# Altium PCB AX301_AX4010.PcbDoc (part 6 of 10)
Units mil, origin at the board's own origin, x right, y up, seen from the top; angles counter-clockwise.
Board outline 5185 x 3614 mil, 4 copper layers (Top Layer, GND, Mid-Layer 1, Bottom Layer); 191 components, 338 nets, 1108 pads, 420 vias.
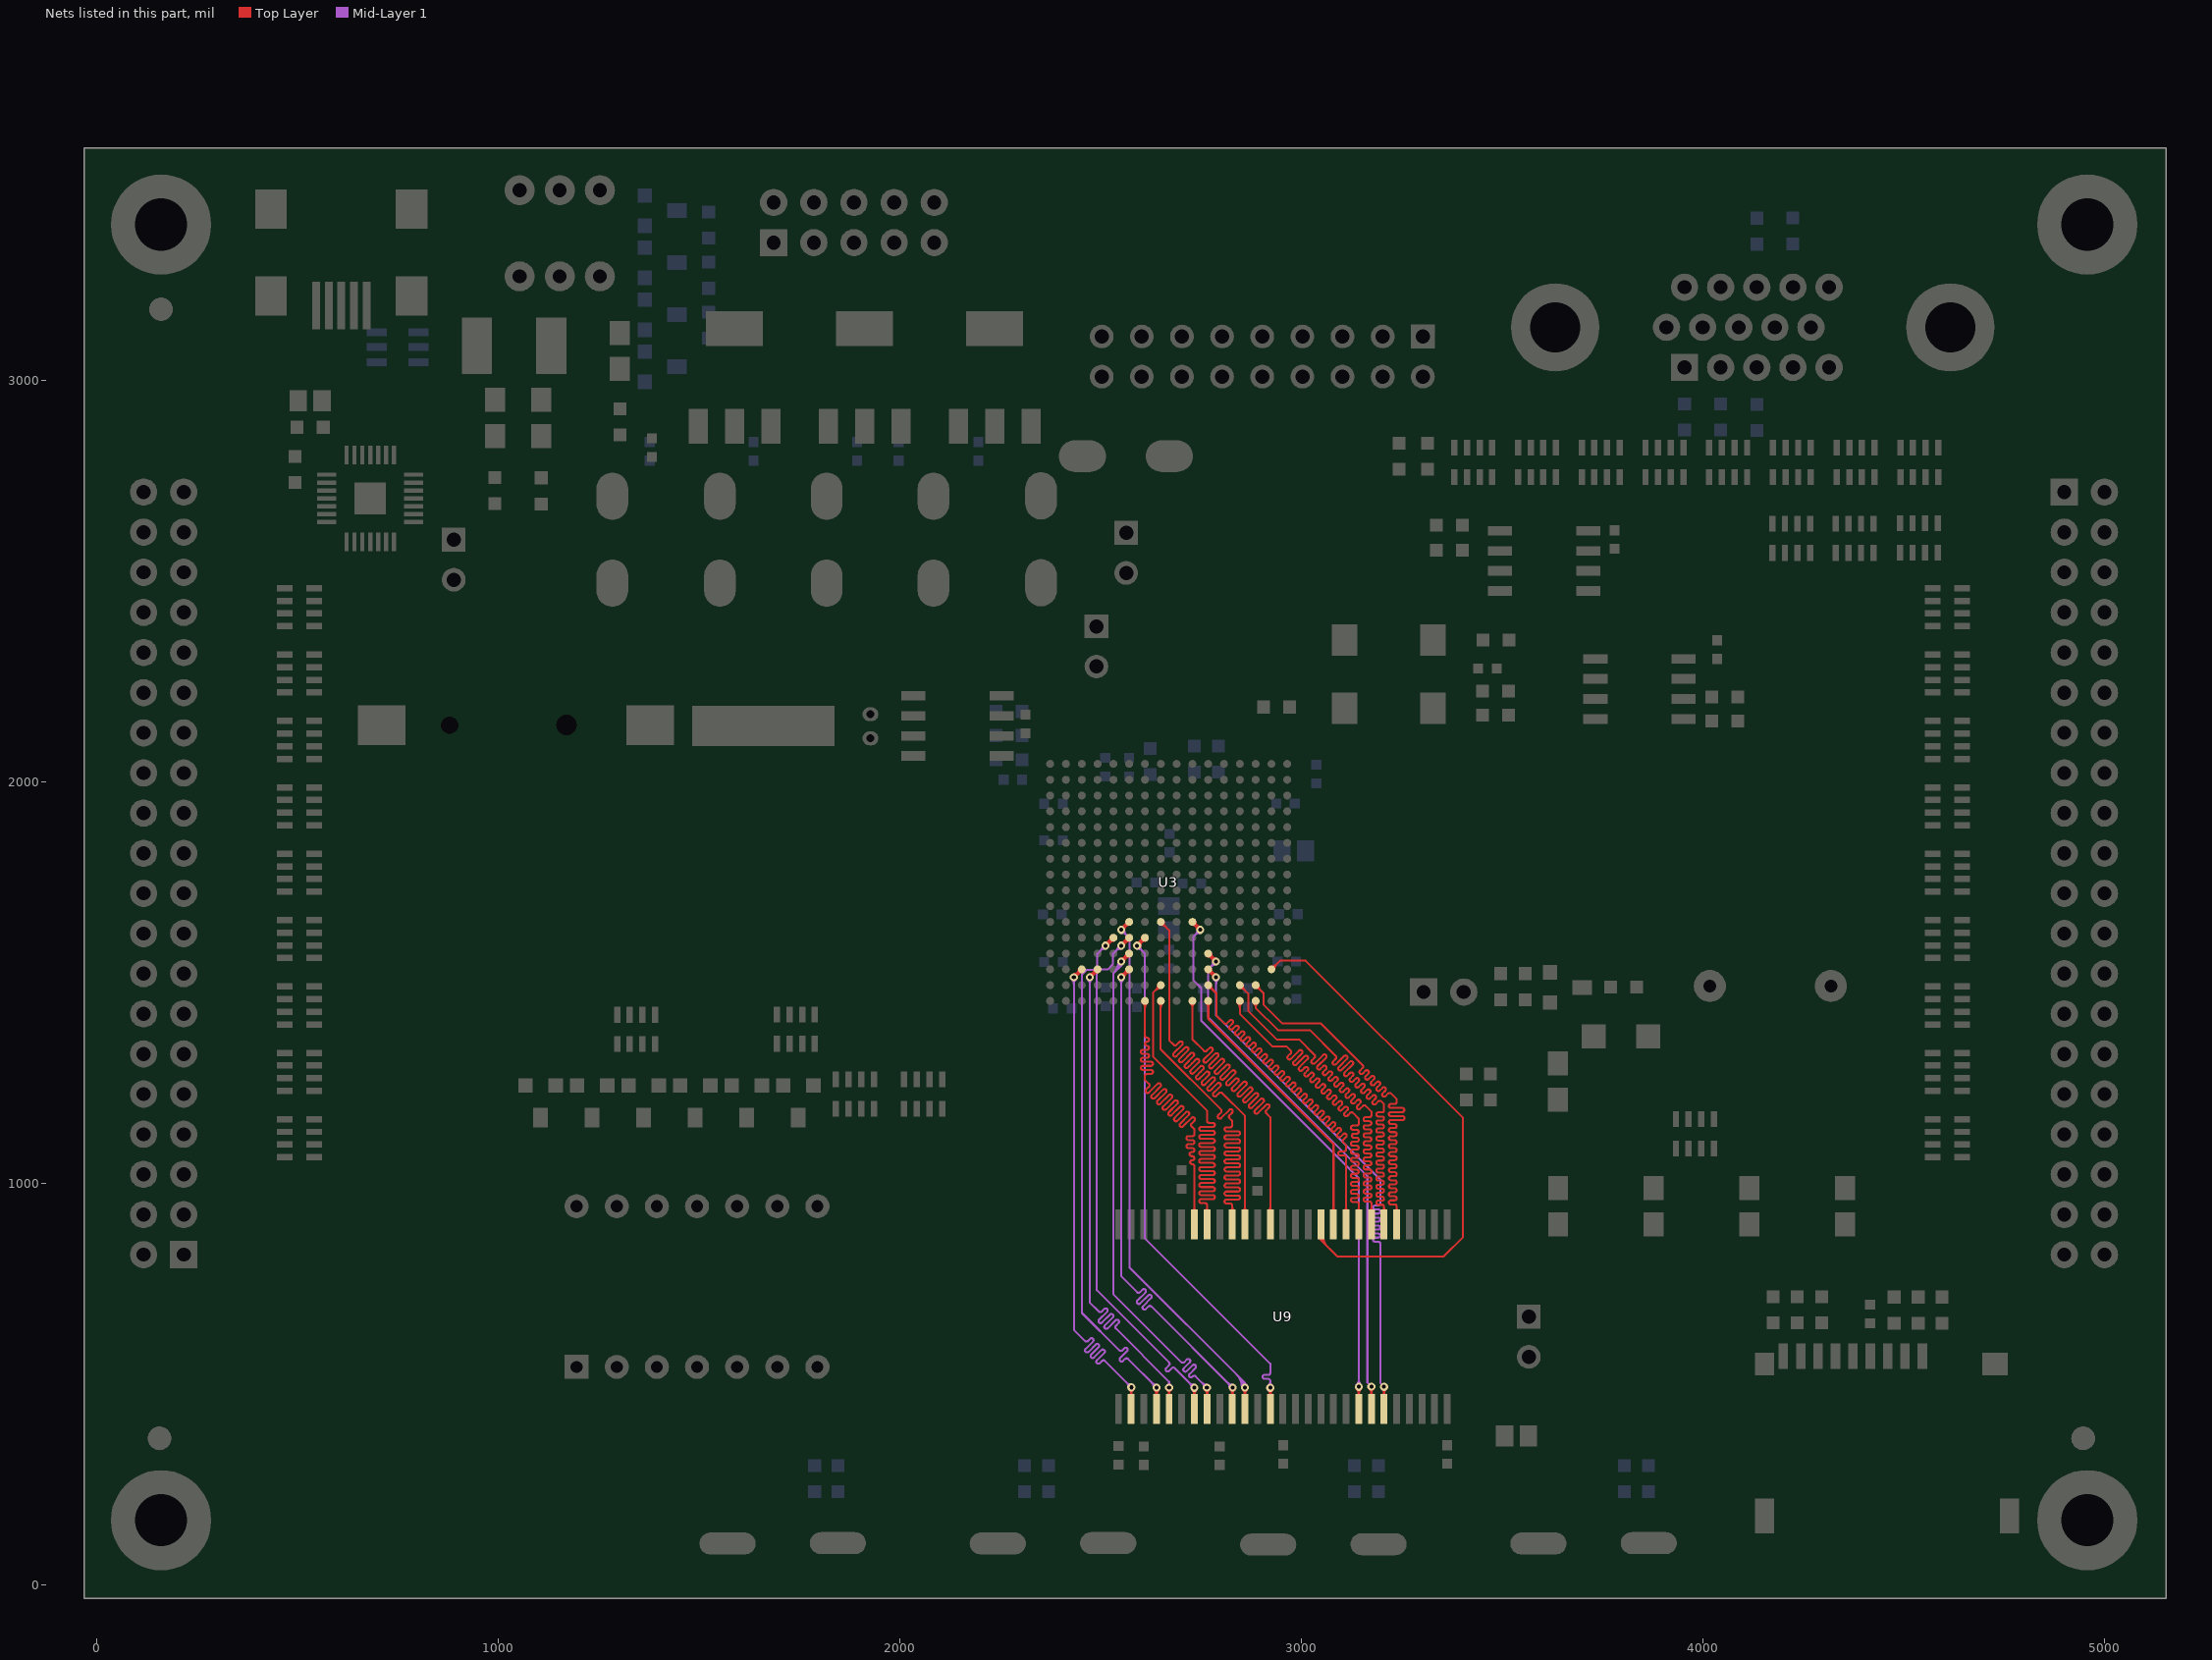
[diagram p8: the nets of this part, all layers, seen from the top]

## Via types
v1: diameter 20, hole 10, Top Layer to Bottom Layer, 377 vias
v2: diameter 30, hole 15, Top Layer to Bottom Layer, 41 vias
v3: diameter 40, hole 20, Top Layer to Bottom Layer, 2 vias

## Nets (pads, with @x,y where several pads share a name; then routed paths per layer and width w, separated by ;. In a path a pad name is that pad's centre, name@x,y a point inside that pad or via, vN(x,y) a via of type N, cw(c..) or ccw(c..) an arc to the next point about the centre after c; other vN are vias at no path point) (continued)
S_A7: U3.C15 U9.32 | length 1466.8
  Top Layer w5: U3.C15@2886.54,1485.75 cw(c2886.54,1468.03) 2899.07,1480.56 cw(c2911.6,1493.09) U3.C15@2893.88,1493.09 ; U3.C15@2886.54,1493.09 2906,1473.63 2906,1445 2953.5,1397.5 3049.5,1397.5 3153.06,1293.94 cw(c3149.52,1290.4) 3153.06,1286.87 3146.47,1280.28 ccw(c3150.01,1276.74) 3146.47,1273.21 ccw(c3150.01,1276.74) 3153.54,1273.21 3160.13,1279.8 cw(c3163.67,1276.26) 3167.2,1279.8 cw(c3163.67,1276.26) 3167.2,1272.73 3160.61,1266.14 ccw(c3164.15,1262.6) 3160.61,1259.06 ccw(c3164.15,1262.6) 3167.68,1259.06 3174.27,1265.66 cw(c3177.81,1262.12) 3181.34,1265.66 cw(c3177.81,1262.12) 3181.34,1258.58 3174.75,1251.99 ccw(c3178.29,1248.46) 3174.75,1244.92 ccw(c3178.29,1248.46) 3181.83,1244.92 3188.42,1251.51 cw(c3191.95,1247.98) 3195.49,1251.51 cw(c3191.95,1247.98) 3195.49,1244.44 3188.9,1237.85 ccw(c3192.43,1234.32) 3188.9,1230.78 ccw(c3192.43,1234.32) 3195.97,1230.78 3202.56,1237.37 cw(c3206.09,1233.84) 3209.63,1237.37 cw(c3206.09,1233.84) 3209.63,1230.3 3203.04,1223.71 ccw(c3206.57,1220.17) 3203.04,1216.64 ccw(c3206.57,1220.17) 3210.11,1216.64 3216.7,1223.23 cw(c3220.24,1219.69) 3223.77,1223.23 3237.91,1209.09 3237.91,1202 cw(c3232.91,1202) 3232.91,1197 3223.59,1197 ccw(c3223.59,1192) 3218.59,1192 ccw(c3223.59,1192) 3223.59,1187 3252.23,1187 cw(c3252.23,1182) 3257.23,1182 cw(c3252.23,1182) 3252.23,1177 3223.59,1177 ccw(c3223.59,1172) 3218.59,1172 ccw(c3223.59,1172) 3223.59,1167 3252.23,1167 cw(c3252.23,1162) 3257.23,1162 cw(c3252.23,1162) 3252.23,1157 3223.59,1157 ccw(c3223.59,1152) 3218.59,1152 ccw(c3223.59,1152) 3223.59,1147 3232.91,1147 cw(c3232.91,1142) 3237.91,1142 cw(c3232.91,1142) 3232.91,1137 3223.59,1137 ccw(c3223.59,1132) 3218.59,1132 ccw(c3223.59,1132) 3223.59,1127 3232.91,1127 cw(c3232.91,1122) 3237.91,1122 cw(c3232.91,1122) 3232.91,1117 3223.59,1117 ccw(c3223.59,1112) 3218.59,1112 ccw(c3223.59,1112) 3223.59,1107 3232.91,1107 cw(c3232.91,1102) 3237.91,1102 cw(c3232.91,1102) 3232.91,1097 3223.59,1097 ccw(c3223.59,1092) 3218.59,1092 ccw(c3223.59,1092) 3223.59,1087 3232.91,1087 cw(c3232.91,1082) 3237.91,1082 cw(c3232.91,1082) 3232.91,1077 3223.59,1077 ccw(c3223.59,1072) 3218.59,1072 ccw(c3223.59,1072) 3223.59,1067 3232.91,1067 cw(c3232.91,1062) 3237.91,1062 cw(c3232.91,1062) 3232.91,1057 3223.59,1057 ccw(c3223.59,1052) 3218.59,1052 ccw(c3223.59,1052) 3223.59,1047 3232.91,1047 cw(c3232.91,1042) 3237.91,1042 cw(c3232.91,1042) 3232.91,1037 3223.59,1037 ccw(c3223.59,1032) 3218.59,1032 ccw(c3223.59,1032) 3223.59,1027 3232.91,1027 cw(c3232.91,1022) 3237.91,1022 cw(c3232.91,1022) 3232.91,1017 3223.59,1017 ccw(c3223.59,1012) 3218.59,1012 ccw(c3223.59,1012) 3223.59,1007 3232.91,1007 cw(c3232.91,1002) 3237.91,1002 cw(c3232.91,1002) 3232.91,997 3223.59,997 ccw(c3223.59,992) 3218.59,992 ccw(c3223.59,992) 3223.59,987 3232.91,987 cw(c3232.91,982) 3237.91,982 cw(c3232.91,982) 3232.91,977 3223.59,977 ccw(c3223.59,972) 3218.59,972 ccw(c3223.59,972) 3223.59,967 3232.91,967 cw(c3232.91,962) 3237.91,962 cw(c3232.91,962) 3232.91,957 3223.59,957 ccw(c3223.59,952) 3218.59,952 ccw(c3223.59,952) 3223.59,947 3232.91,947 cw(c3232.91,942) 3237.91,942 U9.32@3237.91,897 ; U9.32@3233.67,930.24 ccw(c3223.43,940.49) 3237.91,940.49 ccw(c3252.4,940.49) U9.32@3242.16,930.24
S_A8: U3.C16 U9.33 | length 1465.7
  Top Layer w5: U3.C16@2881.44,1448.43 cw(c2869.92,1436.47) 2886.54,1436.47 ; U3.C16@2886.54,1453.72 2886.54,1436.46 ; 2886.62,1436.38 2942,1381 3022,1381 3086.21,1316.79 cw(c3082.67,1313.26) 3086.21,1309.72 3079.59,1303.1 ccw(c3083.13,1299.56) 3079.59,1296.03 ccw(c3083.13,1299.56) 3086.66,1296.03 3096.82,1306.18 3106.97,1316.34 cw(c3110.51,1312.8) 3114.04,1316.34 cw(c3110.51,1312.8) 3114.04,1309.27 3093.73,1288.96 ccw(c3097.27,1285.42) 3093.73,1281.89 ccw(c3097.27,1285.42) 3100.8,1281.89 3121.11,1302.2 cw(c3124.65,1298.66) 3128.18,1302.2 cw(c3124.65,1298.66) 3128.18,1295.13 3107.87,1274.82 ccw(c3111.41,1271.28) 3107.87,1267.74 ccw(c3111.41,1271.28) 3114.94,1267.74 3121.56,1274.36 cw(c3125.1,1270.83) 3128.64,1274.36 cw(c3125.1,1270.83) 3128.64,1267.29 3122.02,1260.67 ccw(c3125.55,1257.14) 3122.02,1253.6 ccw(c3125.55,1257.14) 3129.09,1253.6 3135.71,1260.22 cw(c3139.24,1256.69) 3142.78,1260.22 cw(c3139.24,1256.69) 3142.78,1253.15 3136.16,1246.53 ccw(c3139.69,1243) 3136.16,1239.46 ccw(c3139.69,1243) 3143.23,1239.46 3149.85,1246.08 cw(c3153.38,1242.54) 3156.92,1246.08 cw(c3153.38,1242.54) 3156.92,1239.01 3150.3,1232.39 ccw(c3153.84,1228.85) 3150.3,1225.32 ccw(c3153.84,1228.85) 3157.37,1225.32 3163.99,1231.94 cw(c3167.53,1228.4) 3171.06,1231.94 cw(c3167.53,1228.4) 3171.06,1224.87 3164.44,1218.25 ccw(c3167.98,1214.71) 3164.44,1211.18 ccw(c3167.98,1214.71) 3171.51,1211.18 3178.13,1217.8 cw(c3181.67,1214.26) 3185.2,1217.8 cw(c3181.67,1214.26) 3185.2,1210.72 3178.58,1204.11 ccw(c3182.12,1200.57) 3178.58,1197.03 ccw(c3182.12,1200.57) 3185.66,1197.03 3192.28,1203.65 cw(c3195.81,1200.12) 3199.35,1203.65 3206.42,1196.58 3206.42,1181 cw(c3201.42,1181) 3201.42,1176 3192.06,1176 ccw(c3192.06,1171) 3187.06,1171 ccw(c3192.06,1171) 3192.06,1166 3201.42,1166 cw(c3201.42,1161) 3206.42,1161 cw(c3201.42,1161) 3201.42,1156 3192.06,1156 ccw(c3192.06,1151) 3187.06,1151 ccw(c3192.06,1151) 3192.06,1146 3201.42,1146 cw(c3201.42,1141) 3206.42,1141 cw(c3201.42,1141) 3201.42,1136 3192.06,1136 ccw(c3192.06,1131) 3187.06,1131 ccw(c3192.06,1131) 3192.06,1126 3201.42,1126 cw(c3201.42,1121) 3206.42,1121 cw(c3201.42,1121) 3201.42,1116 3192.06,1116 ccw(c3192.06,1111) 3187.06,1111 ccw(c3192.06,1111) 3192.06,1106 3201.42,1106 cw(c3201.42,1101) 3206.42,1101 cw(c3201.42,1101) 3201.42,1096 3192.06,1096 ccw(c3192.06,1091) 3187.06,1091 ccw(c3192.06,1091) 3192.06,1086 3201.42,1086 cw(c3201.42,1081) 3206.42,1081 cw(c3201.42,1081) 3201.42,1076 3192.06,1076 ccw(c3192.06,1071) 3187.06,1071 ccw(c3192.06,1071) 3192.06,1066 3201.42,1066 cw(c3201.42,1061) 3206.42,1061 cw(c3201.42,1061) 3201.42,1056 3192.06,1056 ccw(c3192.06,1051) 3187.06,1051 ccw(c3192.06,1051) 3192.06,1046 3201.42,1046 cw(c3201.42,1041) 3206.42,1041 cw(c3201.42,1041) 3201.42,1036 3192.06,1036 ccw(c3192.06,1031) 3187.06,1031 ccw(c3192.06,1031) 3192.06,1026 3201.42,1026 cw(c3201.42,1021) 3206.42,1021 cw(c3201.42,1021) 3201.42,1016 3192.06,1016 ccw(c3192.06,1011) 3187.06,1011 ccw(c3192.06,1011) 3192.06,1006 3201.42,1006 cw(c3201.42,1001) 3206.42,1001 cw(c3201.42,1001) 3201.42,996 3192.06,996 ccw(c3192.06,991) 3187.06,991 ccw(c3192.06,991) 3192.06,986 3201.42,986 cw(c3201.42,981) 3206.42,981 cw(c3201.42,981) 3201.42,976 3192.06,976 ccw(c3192.06,971) 3187.06,971 ccw(c3192.06,971) 3192.06,966 3201.42,966 cw(c3201.42,961) 3206.42,961 cw(c3201.42,961) 3201.42,956 3192.06,956 ccw(c3192.06,951) 3187.06,951 ccw(c3192.06,951) 3192.06,946 3201.42,946 cw(c3201.42,941) 3206.42,941 U9.33@3206.42,897 ; U3.C16@2891.63,1448.43 ccw(c2903.15,1436.47) 2886.54,1436.47 ; U9.33@3202.17,930.24 ccw(c3191.93,940.49) 3206.42,940.49 ccw(c3220.9,940.49) U9.33@3210.66,930.24
S_A9: U3.D15 U9.34 | length 1466.8
  Top Layer w5: U3.D15@2847.17,1485.75 cw(c2847.17,1468.03) 2859.7,1480.56 cw(c2872.23,1493.09) U3.D15@2854.51,1493.09 ; U3.D15@2847.17,1493.09 2868,1472.26 2868,1429 2940,1357 2996,1357 3033.58,1319.42 cw(c3030.04,1315.89) 3033.58,1312.35 3026.79,1305.56 ccw(c3030.33,1302.03) 3026.79,1298.49 ccw(c3030.33,1302.03) 3033.86,1298.49 3054.51,1319.14 cw(c3058.04,1315.6) 3061.58,1319.14 cw(c3058.04,1315.6) 3061.58,1312.07 3040.93,1291.42 ccw(c3044.47,1287.88) 3040.93,1284.35 ccw(c3044.47,1287.88) 3048,1284.35 3054.79,1291.14 cw(c3058.33,1287.6) 3061.86,1291.14 cw(c3058.33,1287.6) 3061.86,1284.07 3055.07,1277.28 ccw(c3058.61,1273.74) 3055.07,1270.21 ccw(c3058.61,1273.74) 3062.15,1270.21 3068.93,1276.99 cw(c3072.47,1273.46) 3076,1276.99 cw(c3072.47,1273.46) 3076.01,1269.92 3069.22,1263.14 ccw(c3072.75,1259.6) 3069.22,1256.06 ccw(c3072.75,1259.6) 3076.29,1256.06 3083.08,1262.85 cw(c3086.61,1259.32) 3090.15,1262.85 cw(c3086.61,1259.32) 3090.15,1255.78 3083.36,1248.99 ccw(c3086.89,1245.46) 3083.36,1241.92 ccw(c3086.89,1245.46) 3090.43,1241.92 3097.22,1248.71 cw(c3100.75,1245.18) 3104.29,1248.71 cw(c3100.75,1245.18) 3104.29,1241.64 3097.5,1234.85 ccw(c3101.04,1231.32) 3097.5,1227.78 ccw(c3101.04,1231.32) 3104.57,1227.78 3111.36,1234.57 cw(c3114.9,1231.03) 3118.43,1234.57 cw(c3114.9,1231.03) 3118.43,1227.5 3111.64,1220.71 ccw(c3115.18,1217.17) 3111.64,1213.64 ccw(c3115.18,1217.17) 3118.71,1213.64 3125.5,1220.43 cw(c3129.04,1216.89) 3132.57,1220.43 cw(c3129.04,1216.89) 3132.57,1213.36 3125.79,1206.57 ccw(c3129.32,1203.03) 3125.79,1199.5 ccw(c3129.32,1203.03) 3132.86,1199.5 3139.64,1206.28 cw(c3143.18,1202.75) 3146.72,1206.28 cw(c3143.18,1202.75) 3146.72,1199.21 3139.93,1192.43 ccw(c3143.46,1188.89) 3139.93,1185.35 ccw(c3143.46,1188.89) 3147,1185.35 3153.79,1192.14 cw(c3157.32,1188.61) 3160.86,1192.14 3175,1178 3175,1169 cw(c3170,1169) 3170,1164 3160.4,1164 ccw(c3160.4,1159) 3155.4,1159 ccw(c3160.4,1159) 3160.4,1154 3170,1154 cw(c3170,1149) 3175,1149 cw(c3170,1149) 3170,1144 3160.4,1144 ccw(c3160.4,1139) 3155.4,1139 ccw(c3160.4,1139) 3160.4,1134 3170,1134 cw(c3170,1129) 3175,1129 cw(c3170,1129) 3170,1124 3160.4,1124 ccw(c3160.4,1119) 3155.4,1119 ccw(c3160.4,1119) 3160.4,1114 3170,1114 cw(c3170,1109) 3175,1109 cw(c3170,1109) 3170,1104 3160.4,1104 ccw(c3160.4,1099) 3155.4,1099 ccw(c3160.4,1099) 3160.4,1094 3170,1094 cw(c3170,1089) 3175,1089 cw(c3170,1089) 3170,1084 3160.4,1084 ccw(c3160.4,1079) 3155.4,1079 ccw(c3160.4,1079) 3160.4,1074 3170,1074 cw(c3170,1069) 3175,1069 cw(c3170,1069) 3170,1064 3160.4,1064 ccw(c3160.4,1059) 3155.4,1059 ccw(c3160.4,1059) 3160.4,1054 3170,1054 cw(c3170,1049) 3175,1049 cw(c3170,1049) 3170,1044 3160.4,1044 ccw(c3160.4,1039) 3155.4,1039 ccw(c3160.4,1039) 3160.4,1034 3170,1034 cw(c3170,1029) 3175,1029 cw(c3170,1029) 3170,1024 3160.4,1024 ccw(c3160.4,1019) 3155.4,1019 ccw(c3160.4,1019) 3160.4,1014 3170,1014 cw(c3170,1009) 3175,1009 cw(c3170,1009) 3170,1004 3160.4,1004 ccw(c3160.4,999) 3155.4,999 ccw(c3160.4,999) 3160.4,994 3170,994 cw(c3170,989) 3175,989 cw(c3170,989) 3170,984 3160.4,984 ccw(c3160.4,979) 3155.4,979 ccw(c3160.4,979) 3160.4,974 3170,974 cw(c3170,969) 3175,969 cw(c3170,969) 3170,964 3160.4,964 ccw(c3160.4,959) 3155.4,959 ccw(c3160.4,959) 3160.4,954 3170,954 cw(c3170,949) 3175,949 U9.34@3175,897 ; U9.34@3170.76,930.24 ccw(c3160.51,940.49) 3175,940.49 ccw(c3189.49,940.49) U9.34@3179.24,930.24
S_A10: U3.F14 U9.22 | length 1533.2
  Top Layer w5: v1@3201.11,487.11 cw(c3188.31,474.31) 3206.42,474.31 cw(c3224.52,474.31) v1@3211.72,487.11 ; U9.22@3202.17,470.24 ccw(c3191.93,480.49) 3206.42,480.49 ccw(c3220.9,480.49) U9.22@3210.66,470.24 ; U9.22@3206.42,437 v1(3206.42,492.42)
  Top Layer w10: U3.F14@2768.43,1527.62 cw(c2768.43,1515.93) 2776.69,1524.2 cw(c2784.96,1532.46) U3.F14@2773.27,1532.46 ; U3.F14@2768.43,1532.46 v1(2788.11,1512.78) ; v1@2783.11,1512.78 ccw(c2771.04,1512.78) 2779.58,1521.31 ccw(c2788.11,1529.85) v1@2788.11,1517.78
  Mid-Layer 1 w5: v1@2782.81,1507.48 cw(c2770,1494.67) 2788.11,1494.67 cw(c2806.22,1494.67) v1@2793.41,1507.48 ; v1(2788.11,1512.78) 2788.11,1417.89 3197,1009 3197,949 cw(c3192,949) 3192,944 3183.78,944 ccw(c3183.78,939) 3178.78,939 ccw(c3183.78,939) 3183.78,934 3192,934 cw(c3192,929) 3197,929 cw(c3192,929) 3192,924 3183.78,924 ccw(c3183.78,919) 3178.78,919 ccw(c3183.78,919) 3183.78,914 3192,914 cw(c3192,909) 3197,909 cw(c3192,909) 3192,904 3183.78,904 ccw(c3183.78,899) 3178.78,899 ccw(c3183.78,899) 3183.78,894 3192,894 cw(c3192,889) 3197,889 cw(c3192,889) 3192,884 3183.78,884 ccw(c3183.78,879) 3178.78,879 ccw(c3183.78,879) 3183.78,874 3192,874 cw(c3192,869) 3197,869 cw(c3192,869) 3192,864 3183.78,864 ccw(c3183.78,859) 3178.78,859 ccw(c3183.78,859) 3183.78,854 3192,854 cw(c3192,849) 3197,849 3197,501.83 v1(3206.42,492.42)
S_A11: U3.D16 U9.35 | length 1466.8
  Top Layer w5: U3.D16@2841.97,1448.53 cw(c2829.44,1436) 2847.17,1436 cw(c2864.89,1436) U3.D16@2852.36,1448.53 ; U3.D16@2847.17,1453.72 2847.17,1421.83 2929,1340 2964,1340 2973.72,1330.28 cw(c2970.18,1326.74) 2973.72,1323.21 2966.94,1316.43 ccw(c2970.47,1312.89) 2966.94,1309.35 ccw(c2970.47,1312.89) 2974.01,1309.35 2994.65,1329.99 cw(c2998.18,1326.46) 3001.72,1329.99 cw(c2998.18,1326.46) 3001.72,1322.92 2981.08,1302.28 ccw(c2984.61,1298.75) 2981.08,1295.21 ccw(c2984.61,1298.75) 2988.15,1295.21 3008.79,1315.85 cw(c3012.32,1312.32) 3015.86,1315.85 cw(c3012.32,1312.32) 3015.86,1308.78 2995.22,1288.14 ccw(c2998.76,1284.61) 2995.22,1281.07 ccw(c2998.76,1284.61) 3002.29,1281.07 3009.07,1287.85 cw(c3012.61,1284.32) 3016.15,1287.85 cw(c3012.61,1284.32) 3016.15,1280.78 3009.36,1274 ccw(c3012.9,1270.46) 3009.36,1266.93 ccw(c3012.9,1270.46) 3016.43,1266.93 3023.22,1273.71 cw(c3026.75,1270.18) 3030.29,1273.71 cw(c3026.75,1270.18) 3030.29,1266.64 3023.5,1259.86 ccw(c3027.04,1256.32) 3023.5,1252.79 ccw(c3027.04,1256.32) 3030.58,1252.79 3037.36,1259.57 cw(c3040.89,1256.03) 3044.43,1259.57 cw(c3040.89,1256.03) 3044.43,1252.5 3037.65,1245.71 ccw(c3041.18,1242.18) 3037.65,1238.64 ccw(c3041.18,1242.18) 3044.72,1238.64 3051.5,1245.43 cw(c3055.04,1241.89) 3058.57,1245.43 cw(c3055.04,1241.89) 3058.57,1238.36 3051.79,1231.57 ccw(c3055.32,1228.04) 3051.79,1224.5 ccw(c3055.32,1228.04) 3058.86,1224.5 3065.64,1231.29 cw(c3069.18,1227.75) 3072.71,1231.29 cw(c3069.18,1227.75) 3072.71,1224.21 3065.93,1217.43 ccw(c3069.47,1213.89) 3065.93,1210.36 ccw(c3069.47,1213.89) 3073,1210.36 3079.79,1217.14 cw(c3083.32,1213.61) 3086.86,1217.14 cw(c3083.32,1213.61) 3086.86,1210.07 3080.07,1203.29 ccw(c3083.61,1199.75) 3080.07,1196.22 ccw(c3083.61,1199.75) 3087.14,1196.22 3093.93,1203 cw(c3097.46,1199.47) 3101,1203 cw(c3097.46,1199.47) 3101,1195.93 3094.21,1189.15 ccw(c3097.75,1185.61) 3094.21,1182.08 ccw(c3097.75,1185.61) 3101.29,1182.08 3108.07,1188.86 cw(c3111.61,1185.32) 3115.14,1188.86 cw(c3111.61,1185.32) 3115.14,1181.79 3108.36,1175 ccw(c3111.89,1171.47) 3108.36,1167.93 ccw(c3111.89,1171.47) 3115.43,1167.93 3122.21,1174.72 cw(c3125.75,1171.18) 3129.28,1174.72 3143.43,1160.57 3143.43,1148 cw(c3138.43,1148) 3138.43,1143 3128.83,1143 ccw(c3128.83,1138) 3123.83,1138 ccw(c3128.83,1138) 3128.83,1133 3138.43,1133 cw(c3138.43,1128) 3143.43,1128 cw(c3138.43,1128) 3138.43,1123 3131.24,1123 ccw(c3131.24,1118) 3126.24,1118 ccw(c3131.24,1118) 3131.24,1113 3138.43,1113 cw(c3138.43,1108) 3143.43,1108 cw(c3138.43,1108) 3138.43,1103 3128.83,1103 ccw(c3128.83,1098) 3123.83,1098 ccw(c3128.83,1098) 3128.83,1093 3138.43,1093 cw(c3138.43,1088) 3143.43,1088 cw(c3138.43,1088) 3138.43,1083 3128.83,1083 ccw(c3128.83,1078) 3123.83,1078 ccw(c3128.83,1078) 3128.83,1073 3138.43,1073 cw(c3138.43,1068) 3143.43,1068 cw(c3138.43,1068) 3138.43,1063 3128.83,1063 ccw(c3128.83,1058) 3123.83,1058 ccw(c3128.83,1058) 3128.83,1053 3138.43,1053 cw(c3138.43,1048) 3143.43,1048 cw(c3138.43,1048) 3138.43,1043 3128.83,1043 ccw(c3128.83,1038) 3123.83,1038 ccw(c3128.83,1038) 3128.83,1033 3138.43,1033 cw(c3138.43,1028) 3143.43,1028 cw(c3138.43,1028) 3138.43,1023 3128.83,1023 ccw(c3128.83,1018) 3123.83,1018 ccw(c3128.83,1018) 3128.83,1013 3138.43,1013 cw(c3138.43,1008) 3143.43,1008 cw(c3138.43,1008) 3138.43,1003 3128.83,1003 ccw(c3128.83,998) 3123.83,998 ccw(c3128.83,998) 3128.83,993 3138.43,993 cw(c3138.43,988) 3143.43,988 cw(c3138.43,988) 3138.43,983 3128.83,983 ccw(c3128.83,978) 3123.83,978 ccw(c3128.83,978) 3128.83,973 3138.43,973 cw(c3138.43,968) 3143.43,968 cw(c3138.43,968) 3138.43,963 3128.83,963 ccw(c3128.83,958) 3123.83,958 ccw(c3128.83,958) 3128.83,953 3138.43,953 cw(c3138.43,948) 3143.43,948 U9.35@3143.43,897 ; U9.35@3139.18,930.24 ccw(c3128.94,940.49) 3143.43,940.49 ccw(c3157.91,940.49) U9.35@3147.67,930.24
S_A12: U3.F15 U9.36 | length 1466.8
  Top Layer w5: U3.F15@2768.43,1485.75 cw(c2768.43,1468.03) 2780.96,1480.56 cw(c2793.49,1493.09) U3.F15@2775.77,1493.09 ; U3.F15@2768.43,1493.09 2789,1472.52 2789,1417 2808,1398 ccw(c2811.54,1401.54) 2815.07,1398 2821.93,1404.86 cw(c2825.46,1401.32) 2829,1404.86 cw(c2825.46,1401.32) 2829,1397.79 2822.14,1390.93 ccw(c2825.68,1387.39) 2822.14,1383.86 ccw(c2825.68,1387.39) 2829.21,1383.86 2836.07,1390.71 cw(c2839.61,1387.18) 2843.14,1390.71 cw(c2839.61,1387.18) 2843.14,1383.64 2836.28,1376.79 ccw(c2839.82,1373.25) 2836.28,1369.72 ccw(c2839.82,1373.25) 2843.36,1369.72 2850.21,1376.57 cw(c2853.75,1373.04) 2857.28,1376.57 cw(c2853.75,1373.04) 2857.28,1369.5 2850.43,1362.64 ccw(c2853.96,1359.11) 2850.43,1355.57 ccw(c2853.96,1359.11) 2857.5,1355.57 2864.35,1362.43 cw(c2867.89,1358.89) 2871.43,1362.43 cw(c2867.89,1358.89) 2871.43,1355.36 2864.57,1348.5 ccw(c2868.1,1344.97) 2864.57,1341.43 ccw(c2868.1,1344.97) 2871.64,1341.43 2878.5,1348.29 cw(c2882.03,1344.75) 2885.57,1348.29 cw(c2882.03,1344.75) 2885.57,1341.22 2878.71,1334.36 ccw(c2882.25,1330.82) 2878.71,1327.29 ccw(c2882.25,1330.82) 2885.78,1327.29 2892.64,1334.15 cw(c2896.17,1330.61) 2899.71,1334.15 cw(c2896.17,1330.61) 2899.71,1327.07 2892.85,1320.22 ccw(c2896.39,1316.68) 2892.85,1313.15 ccw(c2896.39,1316.68) 2899.92,1313.15 2906.78,1320 cw(c2910.32,1316.47) 2913.85,1320 cw(c2910.32,1316.47) 2913.85,1312.93 2906.99,1306.08 ccw(c2910.53,1302.54) 2906.99,1299.01 ccw(c2910.53,1302.54) 2914.07,1299.01 2920.92,1305.86 cw(c2924.46,1302.33) 2927.99,1305.86 cw(c2924.46,1302.33) 2927.99,1298.79 2921.14,1291.93 ccw(c2924.67,1288.4) 2921.14,1284.86 ccw(c2924.67,1288.4) 2928.21,1284.86 2935.06,1291.72 cw(c2938.6,1288.18) 2942.14,1291.72 cw(c2938.6,1288.18) 2942.14,1284.65 2935.28,1277.79 ccw(c2938.81,1274.26) 2935.28,1270.72 ccw(c2938.81,1274.26) 2942.35,1270.72 2949.21,1277.58 cw(c2952.74,1274.04) 2956.28,1277.58 cw(c2952.74,1274.04) 2956.28,1270.51 2949.42,1263.65 ccw(c2952.96,1260.11) 2949.42,1256.58 ccw(c2952.96,1260.11) 2956.49,1256.58 2963.35,1263.44 cw(c2966.88,1259.9) 2970.42,1263.44 cw(c2966.88,1259.9) 2970.42,1256.36 2963.56,1249.51 ccw(c2967.1,1245.97) 2963.56,1242.44 ccw(c2967.1,1245.97) 2970.63,1242.44 2977.49,1249.29 cw(c2981.03,1245.76) 2984.56,1249.29 cw(c2981.03,1245.76) 2984.56,1242.22 2977.71,1235.37 ccw(c2981.24,1231.83) 2977.71,1228.29 ccw(c2981.24,1231.83) 2984.78,1228.29 2991.63,1235.15 cw(c2995.17,1231.62) 2998.7,1235.15 cw(c2995.17,1231.62) 2998.7,1228.08 2991.85,1221.22 ccw(c2995.38,1217.69) 2991.85,1214.15 ccw(c2995.38,1217.69) 2998.92,1214.15 3005.78,1221.01 cw(c3009.31,1217.47) 3012.85,1221.01 cw(c3009.31,1217.47) 3012.85,1213.94 3005.99,1207.08 ccw(c3009.53,1203.55) 3005.99,1200.01 ccw(c3009.53,1203.55) 3013.06,1200.01 3019.92,1206.87 cw(c3023.45,1203.33) 3026.99,1206.87 cw(c3023.45,1203.33) 3026.99,1199.8 3020.13,1192.94 ccw(c3023.67,1189.4) 3020.13,1185.87 ccw(c3023.67,1189.4) 3027.2,1185.87 3034.06,1192.72 cw(c3037.6,1189.19) 3041.13,1192.72 cw(c3037.6,1189.19) 3041.13,1185.65 3034.27,1178.8 ccw(c3037.81,1175.26) 3034.27,1171.73 ccw(c3037.81,1175.26) 3041.35,1171.73 3048.2,1178.58 cw(c3051.74,1175.05) 3055.27,1178.58 cw(c3051.74,1175.05) 3055.27,1171.51 3048.42,1164.65 ccw(c3051.95,1161.12) 3048.42,1157.58 ccw(c3051.95,1161.12) 3055.49,1157.58 3062.34,1164.44 cw(c3065.88,1160.9) 3069.42,1164.44 cw(c3065.88,1160.9) 3069.42,1157.37 3062.56,1150.51 ccw(c3066.09,1146.98) 3062.56,1143.44 ccw(c3066.09,1146.98) 3069.63,1143.44 3076.49,1150.3 cw(c3080.02,1146.76) 3083.56,1150.3 cw(c3080.02,1146.76) 3083.56,1143.23 3076.7,1136.37 ccw(c3080.24,1132.84) 3076.7,1129.3 ccw(c3080.24,1132.84) 3083.77,1129.3 3090.63,1136.16 cw(c3094.16,1132.62) 3097.7,1136.16 cw(c3094.16,1132.62) 3097.7,1129.09 3090.84,1122.23 ccw(c3094.38,1118.69) 3090.84,1115.16 ccw(c3094.38,1118.69) 3097.91,1115.16 3104.77,1122.01 cw(c3108.31,1118.48) 3111.84,1122.01 cw(c3108.31,1118.48) 3111.84,1114.94 3104.98,1108.09 ccw(c3108.52,1104.55) 3104.98,1101.02 3111.93,1094.07 3111.93,1084.07 cw(c3106.93,1084.07) 3106.93,1079.07 3097.23,1079.07 ccw(c3097.23,1074.07) 3092.23,1074.07 ccw(c3097.23,1074.07) 3097.23,1069.07 3106.93,1069.07 cw(c3106.93,1064.07) 3111.93,1064.07 U9.36@3111.93,897 ; U9.36@3107.69,930.24 ccw(c3097.44,940.49) 3111.93,940.49 ccw(c3126.41,940.49) U9.36@3116.17,930.24
S_BA0: U3.G11 U9.20 | length 1545.3
  Top Layer w5: v1@3138.12,487.12 cw(c3125.32,474.32) 3143.43,474.32 cw(c3161.53,474.32) v1@3148.73,487.12 ; U9.20@3139.18,470.24 ccw(c3128.94,480.49) 3143.43,480.49 ccw(c3157.91,480.49) U9.20@3147.67,470.24 ; U9.20@3143.43,437 v1(3143.43,492.43)
  Top Layer w10: U3.G11@2729.06,1645.73 cw(c2729.06,1634.04) 2737.32,1642.31 cw(c2745.59,1650.57) U3.G11@2733.9,1650.57 ; U3.G11@2729.06,1650.57 v1(2748.74,1630.89) ; v1@2743.74,1630.89 ccw(c2731.67,1630.89) 2740.21,1639.42 ccw(c2748.74,1647.96) v1@2748.74,1635.89
  Mid-Layer 1 w5: v1@2741.24,1630.89 cw(c2723.13,1630.89) 2735.94,1618.09 cw(c2748.74,1605.28) v1@2748.74,1623.39 ; v1(2748.74,1630.89) 2731,1613.15 2731,1505.77 2751,1485.77 2751,1405 3143.43,1012.57 v1(3143.43,492.43) ; v1@3138.12,497.73 ccw(c3125.32,510.53) 3143.43,510.53 ccw(c3161.53,510.53) v1@3148.73,497.73
S_BA1: U3.F13 U9.21 | length 1436.8
  Top Layer w5: v1@3169.62,487.62 cw(c3156.81,474.81) 3174.92,474.81 cw(c3193.03,474.81) v1@3180.22,487.62 ; U9.21@3170.68,470.24 ccw(c3160.44,480.49) 3174.92,480.49 ccw(c3189.41,480.49) U9.21@3179.16,470.24 ; U9.21@3174.92,437 v1(3174.92,492.92)
  Top Layer w10: U3.F13@2768.43,1566.99 cw(c2768.43,1555.3) 2776.69,1563.57 cw(c2784.96,1571.83) U3.F13@2773.27,1571.83 ; U3.F13@2768.43,1571.83 v1(2788.11,1552.15) ; v1@2783.11,1552.15 ccw(c2771.04,1552.15) 2779.58,1560.68 ccw(c2788.11,1569.22) v1@2788.11,1557.15
  Mid-Layer 1 w5: v1@2780.61,1552.15 cw(c2762.5,1552.15) 2775.31,1539.35 cw(c2788.11,1526.54) v1@2788.11,1544.65 ; v1(2788.11,1552.15) 2768,1532.04 2768,1414 3165,1017 3165,502.84 v1(3174.92,492.92)
S_CKE: U3.F16 U9.37 | length 732.8
  Top Layer w6: U3.F16@2763.59,1448.89 cw(c2751.91,1437.21) 2768.43,1437.21 cw(c2784.94,1437.21) U3.F16@2773.26,1448.89 ; U3.F16@2768.43,1453.72 2768.43,1409.57 3080.43,1097.57 U9.37@3080.43,897 ; U9.37@3076.54,929.89 ccw(c3067.15,939.28) 3080.43,939.28 ccw(c3093.71,939.28) U9.37@3084.32,929.89
S_CLK: U3.B14 U9.38 | length 1476.7
  Top Layer w5: U3.B14@2925.91,1532.46 2947.44,1554 3011,1554 3403,1162 3403,865 3355,817 3090,817 3048.94,858.06 ; U3.B14@2925.91,1539.81 ccw(c2925.91,1557.53) 2938.44,1545 ccw(c2950.97,1532.46) U3.B14@2933.25,1532.46 ; U9.38@3044.94,868 ccw(c3059.27,868) 3049.14,857.86 ; U9.38@3046.14,862.69 cw(c3043.71,858.06) 3048.94,858.06 ; U9.38@3048.94,897 3048.94,858.06 ; U9.38@3049.94,868 ccw(c3076.34,868) 3057.67,849.33 ; U9.38@3051.73,862.69 ccw(c3054.17,858.06) 3048.94,858.06 ; U9.38@3054.94,868 ccw(c3093.41,868) 3066.21,840.79
S_DB0: U3.P14 U9.2 | length 1494.8
  Top Layer w5: v1@2571.7,485.7 cw(c2560.11,474.11) U9.2@2576.5,474.11 ; U9.2@2572.25,470.24 ccw(c2562.01,480.49) 2576.5,480.49 ccw(c2590.98,480.49) U9.2@2580.74,470.24 ; U9.2@2576.5,437 2576.5,490.5 v1(2577,491) ; U9.2@2576.5,471.68 cw(c2596.32,471.68) v1@2582.3,485.7
  Top Layer w10: v1(2433.78,1512.78) U3.P14@2453.46,1532.46 ; v1@2433.78,1517.78 ccw(c2433.78,1529.85) 2442.31,1521.31 ccw(c2450.85,1512.78) v1@2438.78,1512.78 ; U3.P14@2448.62,1532.46 cw(c2436.93,1532.46) 2445.2,1524.2 cw(c2453.46,1515.93) U3.P14@2453.46,1527.62
  Mid-Layer 1 w5: v1@2428.48,1507.48 cw(c2415.67,1494.67) 2433.78,1494.67 cw(c2451.89,1494.67) v1@2439.08,1507.48 ; v1(2433.78,1512.78) 2433.78,634.22 2461.5,606.5 ccw(c2465.04,610.04) 2468.57,606.5 2474.24,612.17 cw(c2477.78,608.64) 2481.31,612.17 cw(c2477.78,608.64) 2481.31,605.1 2462.9,586.69 ccw(c2466.44,583.15) 2462.9,579.62 ccw(c2466.44,583.15) 2469.97,579.62 2488.38,598.03 cw(c2491.92,594.49) 2495.46,598.03 cw(c2491.92,594.49) 2495.46,590.96 2477.04,572.54 ccw(c2480.58,569.01) 2477.04,565.47 ccw(c2480.58,569.01) 2484.11,565.47 2502.53,583.89 cw(c2506.06,580.35) 2509.6,583.89 cw(c2506.06,580.35) 2509.6,576.82 2491.18,558.4 ccw(c2494.72,554.87) 2491.18,551.33 ccw(c2494.72,554.87) 2498.25,551.33 2503.93,557 cw(c2507.46,553.47) 2511,557 v1(2577,491) ; v1@2569.5,491 ccw(c2551.39,491) 2564.2,503.8 ccw(c2577,516.61) v1@2577,498.5
S_DB1: U3.M12 U9.4 | length 1524.2
  Top Layer w5: v1@2634.7,485.1 cw(c2623.13,473.53) U9.4@2639.49,473.53 ; U9.4@2635.25,470.24 ccw(c2625,480.49) 2639.49,480.49 ccw(c2653.97,480.49) U9.4@2643.73,470.24 ; v1@2635.72,484.24 cw(c2631.74,478.52) 2638.48,476.71 ; v1@2636.25,483.91 cw(c2632.42,477.28) 2639.82,479.26 ; 2638.61,477.21 cw(c2649.27,474.35) v1@2643.75,483.91 ; U9.4@2639.49,437 2639.49,489.89 v1(2640,490.4) ; U9.4@2639.49,471.06 cw(c2659.34,471.06) v1@2645.3,485.1 ; 2640.06,478.36 cw(c2644.11,479.45) v1@2642.64,483.38
  Top Layer w10: v1(2512.52,1591.52) U3.M12@2532.2,1611.2 ; v1@2512.52,1596.52 ccw(c2512.52,1608.59) 2521.05,1600.05 ccw(c2529.59,1591.52) v1@2517.52,1591.52 ; U3.M12@2527.36,1611.2 cw(c2515.67,1611.2) 2523.94,1602.94 cw(c2532.2,1594.67) U3.M12@2532.2,1606.36
  Mid-Layer 1 w5: v1@2505.02,1591.52 cw(c2486.91,1591.52) 2499.72,1578.72 cw(c2512.52,1565.91) v1@2512.52,1584.02 ; v1(2512.52,1591.52) 2492,1571 2492,1542 2481,1531 2465,1531 2454,1520 2454,676.4 2547.2,583.2 ccw(c2550.74,586.74) 2554.27,583.2 2559.4,588.33 cw(c2562.93,584.79) 2566.47,588.33 cw(c2562.93,584.79) 2566.47,581.26 2549.14,563.93 ccw(c2552.68,560.4) 2549.14,556.86 ccw(c2552.68,560.4) 2556.22,556.86 2561.34,561.99 cw(c2564.88,558.45) 2568.41,561.99 v1(2640,490.4) ; v1@2632.5,490.4 ccw(c2614.39,490.4) 2627.2,503.2 ccw(c2640,516.01) v1@2640,497.9
S_DB2: U3.N14 U9.5 | length 1515.6
  Top Layer w5: v1@2665.68,485.08 cw(c2652.88,472.28) 2670.98,472.28 cw(c2689.09,472.28) v1@2676.29,485.08 ; U9.5@2666.74,470.24 ccw(c2656.5,480.49) 2670.98,480.49 ccw(c2685.47,480.49) U9.5@2675.23,470.24 ; v1@2667.23,483.89 cw(c2662.56,475.79) 2671.59,478.21 ; v1@2667.48,483.76 cw(c2664.93,478.94) 2670.19,477.53 ; 2670.37,478.21 cw(c2679.41,475.79) v1@2674.73,483.89 ; U9.5@2670.98,437 v1(2670.98,490.39) ; 2671.78,477.53 cw(c2677.04,478.94) v1@2674.49,483.76
  Top Layer w10: v1(2473.15,1512.78) U3.N14@2492.83,1532.46 ; v1@2473.15,1517.78 ccw(c2473.15,1529.85) 2481.68,1521.31 ccw(c2490.22,1512.78) v1@2478.15,1512.78 ; U3.N14@2487.99,1532.46 cw(c2476.3,1532.46) 2484.57,1524.2 cw(c2492.83,1515.93) U3.N14@2492.83,1527.62
  Mid-Layer 1 w5: v1@2467.85,1507.48 cw(c2455.04,1494.67) 2473.15,1494.67 cw(c2491.26,1494.67) v1@2478.45,1507.48 ; v1(2473.15,1512.78) 2473.15,702.85 2496,680 ccw(c2499.54,683.54) 2503.07,680 2509.4,686.33 cw(c2512.94,682.8) 2516.47,686.33 cw(c2512.94,682.8) 2516.47,679.26 2496.74,659.53 ccw(c2500.27,655.99) 2496.74,652.46 ccw(c2500.27,655.99) 2503.81,652.46 2523.54,672.19 cw(c2527.08,668.65) 2530.62,672.19 cw(c2527.08,668.65) 2530.62,665.12 2510.88,645.38 ccw(c2514.42,641.85) 2510.88,638.31 ccw(c2514.42,641.85) 2517.95,638.31 2537.69,658.05 cw(c2541.22,654.51) 2544.76,658.05 cw(c2541.22,654.51) 2544.76,650.98 2538.43,644.64 ccw(c2541.96,641.11) 2538.43,637.57 2670.98,505.02 ; v1@2666.61,496.48 ccw(c2660.47,505.02) 2670.98,505.02 ; v1(2670.98,490.39) 2670.98,505.02 ; v1@2675.36,496.48 cw(c2681.5,505.02) 2670.98,505.02
S_DB3: U3.L12 U9.7 | length 1524.1
  Top Layer w5: v1@2728.7,484.7 cw(c2715.95,471.95) U9.7@2733.98,471.95 ; U9.7@2729.73,470.24 ccw(c2719.49,480.49) 2733.98,480.49 ccw(c2748.46,480.49) U9.7@2738.22,470.24 ; v1@2730.25,483.5 cw(c2725.44,475.17) 2734.73,477.66 ; v1@2730.49,483.37 cw(c2728.02,478.69) 2733.13,477.33 ; 2733.19,477.57 cw(c2742.64,475.04) v1@2737.75,483.5 ; U9.7@2733.98,437 v1(2734,490) ; U9.7@2733.98,471.84 cw(c2752.16,471.84) v1@2739.3,484.7 ; 2734.8,477.4 cw(c2739.79,478.74) v1@2737.43,483.33
  Top Layer w10: v1(2551.89,1591.52) U3.L12@2571.57,1611.2 ; v1@2551.89,1596.52 ccw(c2551.89,1608.59) 2560.42,1600.05 ccw(c2568.96,1591.52) v1@2556.89,1591.52 ; U3.L12@2566.73,1611.2 cw(c2555.04,1611.2) 2563.31,1602.94 cw(c2571.57,1594.67) U3.L12@2571.57,1606.36
  Mid-Layer 1 w5: v1@2544.39,1591.52 cw(c2526.28,1591.52) 2539.09,1578.72 cw(c2551.89,1565.91) v1@2551.89,1584.02 ; v1(2551.89,1591.52) 2531,1570.63 2531,1545 2518,1532 2501,1532 2491,1522 2491,733 2670.86,553.14 cw(c2667.32,549.61) 2670.86,546.07 2663.88,539.09 ccw(c2667.41,535.56) 2663.88,532.02 ccw(c2667.41,535.56) 2670.95,532.02 2677.93,539 cw(c2681.46,535.46) 2685,539 v1(2734,490) ; v1@2726.5,490 ccw(c2708.39,490) 2721.2,502.8 ccw(c2734,515.61) v1@2734,497.5
S_DB4: U3.L13 U9.8 | length 1542.9
  Top Layer w6: v1@2760.05,485.45 cw(c2746.96,472.36) U9.8@2765.47,472.36 ; U9.8@2761.58,469.89 ccw(c2752.19,479.28) 2765.47,479.28 ccw(c2778.75,479.28) U9.8@2769.36,469.89 ; v1(2765,490.4) 2765.47,489.93 U9.8@2765.47,437 ; 2765.47,474.64 cw(c2780.76,474.64) v1@2769.95,485.45
  Top Layer w10: v1(2551.89,1552.15) U3.L13@2571.57,1571.83 ; v1@2551.89,1557.15 ccw(c2551.89,1569.22) 2560.42,1560.68 ccw(c2568.96,1552.15) v1@2556.89,1552.15 ; U3.L13@2566.73,1571.83 cw(c2555.04,1571.83) 2563.31,1563.57 cw(c2571.57,1555.3) U3.L13@2571.57,1566.99
  Mid-Layer 1 w5: 2540.48,1530.48 ccw(c2518.97,1551.99) v1@2549.39,1552.14 ; v1@2544.39,1552.11 cw(c2502.09,1551.91) 2532,1522 ; 2548.96,1538.96 ccw(c2535.84,1552.07) v1@2554.39,1552.16 ; v1@2549.61,1545 cw(c2548.62,1541.89) 2551.89,1541.89 ; v1(2551.89,1552.15) 2551.89,1541.89 ; v1@2554.16,1545 ccw(c2555.16,1541.89) 2551.89,1541.89 ; v1@2757.5,490.4 ccw(c2739.39,490.4) 2752.2,503.2 ccw(c2765,516.01) v1@2765,497.9 ; v1(2765,490.4) 2737,518.4 ccw(c2733.46,514.87) 2729.93,518.4 2728.89,517.37 cw(c2725.36,520.9) 2721.82,517.37 cw(c2725.36,520.9) 2721.82,524.44 2736.47,539.09 ccw(c2732.94,542.63) 2736.47,546.16 ccw(c2732.94,542.63) 2729.4,546.16 2714.75,531.51 cw(c2711.22,535.04) 2707.68,531.51 cw(c2711.22,535.04) 2707.68,538.58 2722.33,553.23 ccw(c2718.8,556.77) 2722.33,560.3 ccw(c2718.8,556.77) 2715.26,560.3 2708.72,553.76 cw(c2705.18,557.29) 2701.64,553.76 2532,723.4 2532,1522 ; 2532,1522 2551.89,1541.89
S_DB5: U3.L14 U9.10 | length 1524.2
  Top Layer w5: v1@2823.7,485.1 cw(c2812.19,473.59) U9.10@2828.46,473.59 ; U9.10@2824.22,470.24 ccw(c2813.98,480.49) 2828.46,480.49 ccw(c2842.95,480.49) U9.10@2832.71,470.24 ; v1@2824.69,484.27 cw(c2820.63,478.5) 2827.44,476.67 ; v1@2825.25,483.91 cw(c2821.46,477.34) 2828.78,479.3 ; 2827.57,477.16 cw(c2838.3,474.29) v1@2832.75,483.91 ; U9.10@2828.46,437 2828.46,489.87 v1(2829,490.4) ; U9.10@2828.46,471 cw(c2848.4,471) v1@2834.3,485.1 ; 2829.02,478.4 cw(c2833.03,479.47) v1@2831.59,483.36
  Top Layer w10: v1(2551.89,1512.78) U3.L14@2571.57,1532.46 ; v1@2551.89,1517.78 ccw(c2551.89,1529.85) 2560.42,1521.31 ccw(c2568.96,1512.78) v1@2556.89,1512.78 ; U3.L14@2566.73,1532.46 cw(c2555.04,1532.46) 2563.31,1524.2 cw(c2571.57,1515.93) U3.L14@2571.57,1527.62
  Mid-Layer 1 w5: v1@2546.59,1507.48 cw(c2533.78,1494.67) 2551.89,1494.67 cw(c2570,1494.67) v1@2557.19,1507.48 ; v1(2551.89,1512.78) 2551.89,767.51 2591.4,728 ccw(c2594.94,731.54) 2598.47,728 2604.85,734.38 cw(c2608.39,730.85) 2611.92,734.38 cw(c2608.39,730.85) 2611.92,727.31 2592.09,707.48 ccw(c2595.63,703.94) 2592.09,700.41 ccw(c2595.63,703.94) 2599.16,700.41 2619,720.24 cw(c2622.53,716.7) 2626.07,720.24 cw(c2622.53,716.7) 2626.07,713.17 2606.23,693.33 ccw(c2609.77,689.8) 2606.23,686.26 ccw(c2609.77,689.8) 2613.3,686.26 2619.69,692.64 cw(c2623.22,689.11) 2626.76,692.64 v1(2829,490.4) ; v1@2821.5,490.4 ccw(c2803.39,490.4) 2816.2,503.2 ccw(c2829,516.01) v1@2829,497.9
S_DB6: U3.L11 U9.11 | length 1587.9
  Top Layer w5: v1@2854.7,485.1 cw(c2841.91,472.31) 2859.99,472.31 cw(c2878.13,472.28) v1@2865.3,485.1 ; U9.11@2855.75,470.24 ccw(c2845.51,480.49) 2859.99,480.49 ccw(c2874.48,480.49) U9.11@2864.23,470.24 ; v1@2856.25,483.91 cw(c2851.59,475.84) 2860.59,478.25 ; v1@2856.48,483.78 cw(c2853.91,478.94) 2859.2,477.52 ; 2859.38,478.22 cw(c2868.43,475.79) v1@2863.75,483.91 ; U9.11@2859.99,437 v1(2860,490.4) ; 2860.78,477.55 cw(c2866.03,478.96) v1@2863.5,483.77
  Top Layer w10: v1(2551.89,1630.89) U3.L11@2571.57,1650.57 ; v1@2551.89,1635.89 ccw(c2551.89,1647.96) 2560.42,1639.42 ccw(c2568.96,1630.89) v1@2556.89,1630.89 ; U3.L11@2566.73,1650.57 cw(c2555.04,1650.57) 2563.31,1642.31 cw(c2571.57,1634.04) U3.L11@2571.57,1645.73
  Mid-Layer 1 w5: v1@2551.89,1623.39 cw(c2551.89,1605.28) 2564.69,1618.09 cw(c2577.5,1630.89) v1@2559.39,1630.89 ; v1(2551.89,1630.89) 2572,1610.78 2572,790 2860,502 ; 2839,523 cw(c2806.39,490.4) v1@2852.5,490.4 ; 2847.53,514.47 cw(c2823.46,490.4) v1@2857.5,490.4 ; 2856.07,505.93 cw(c2840.53,490.4) v1@2862.5,490.4 ; v1@2856.92,497.24 ccw(c2854.78,502) 2860,502 ; v1(2860,490.4) 2860,502 ; v1@2863.08,497.24 cw(c2865.22,502) 2860,502
S_DB7: U3.K12 U9.13 | length 1488.3
  Top Layer w6: v1@2918.05,485.05 cw(c2906.21,473.21) U9.13@2922.95,473.21 ; U9.13@2919.06,469.89 ccw(c2909.67,479.28) 2922.95,479.28 ccw(c2936.23,479.28) U9.13@2926.84,469.89 ; U9.13@2922.95,437 v1(2923,490) v1(2923,490) ; U9.13@2922.95,472.99 cw(c2940.01,472.99) v1@2927.95,485.05
  Top Layer w10: v1(2591.26,1591.52) U3.K12@2610.94,1611.2 ; v1@2591.26,1596.52 ccw(c2591.26,1608.59) 2599.79,1600.05 ccw(c2608.33,1591.52) v1@2596.26,1591.52 ; U3.K12@2606.1,1611.2 cw(c2594.41,1611.2) 2602.68,1602.94 cw(c2610.94,1594.67) U3.K12@2610.94,1606.36
  Mid-Layer 1 w5: v1@2591.26,1584.02 cw(c2591.26,1565.91) 2604.06,1578.72 cw(c2616.87,1591.52) v1@2598.76,1591.52 ; v1(2591.26,1591.52) 2610,1572.78 2610,863 2923,550 2923,527 cw(c2918,527) 2918,522 2908.92,522 ccw(c2908.92,517) 2903.92,517 ccw(c2908.92,517) 2908.92,512 2918,512 cw(c2918,507) 2923,507 ; v1@2917.94,495.54 ccw(c2907.49,507) 2923,507 ; v1(2923,490) 2923,507 ; v1@2928.06,495.54 cw(c2938.51,507) 2923,507
S_DB8: U3.G16 U9.42 | length 1400
  Top Layer w5: U3.G16@2723.86,1448.53 cw(c2711.33,1436) 2729.06,1436 cw(c2746.78,1436) U3.G16@2734.25,1448.53 ; U3.G16@2729.06,1453.72 2729.06,1357.94 2757.5,1329.5 ccw(c2761.04,1333.04) 2764.57,1329.5 2771.37,1336.3 cw(c2774.9,1332.76) 2778.44,1336.3 cw(c2774.9,1332.76) 2778.44,1329.22 2757.78,1308.56 ccw(c2761.31,1305.03) 2757.78,1301.49 ccw(c2761.31,1305.03) 2764.85,1301.49 2785.51,1322.15 cw(c2789.04,1318.62) 2792.58,1322.15 cw(c2789.04,1318.62) 2792.58,1315.08 2771.92,1294.42 ccw(c2775.45,1290.88) 2771.92,1287.35 ccw(c2775.45,1290.88) 2778.99,1287.35 2799.65,1308.01 cw(c2803.19,1304.48) 2806.72,1308.01 cw(c2803.19,1304.48) 2806.72,1300.94 2786.06,1280.28 ccw(c2789.6,1276.74) 2786.06,1273.21 ccw(c2789.6,1276.74) 2793.13,1273.21 2813.79,1293.87 cw(c2817.33,1290.33) 2820.86,1293.87 cw(c2817.33,1290.33) 2820.86,1286.8 2800.2,1266.14 ccw(c2803.74,1262.6) 2800.2,1259.07 ccw(c2803.74,1262.6) 2807.27,1259.07 2827.93,1279.73 cw(c2831.47,1276.19) 2835.01,1279.73 cw(c2831.47,1276.19) 2835.01,1272.66 2814.34,1251.99 ccw(c2817.88,1248.46) 2814.34,1244.92 ccw(c2817.88,1248.46) 2821.42,1244.92 2836.11,1259.62 cw(c2839.64,1256.08) 2843.18,1259.62 cw(c2839.64,1256.08) 2843.18,1252.54 2828.49,1237.85 ccw(c2832.02,1234.32) 2828.49,1230.78 ccw(c2832.02,1234.32) 2835.56,1230.78 2856.22,1251.44 cw(c2859.75,1247.91) 2863.29,1251.44 cw(c2859.75,1247.91) 2863.29,1244.37 2842.63,1223.71 ccw(c2846.16,1220.17) 2842.63,1216.64 ccw(c2846.16,1220.17) 2849.7,1216.64 2870.36,1237.3 cw(c2873.9,1233.76) 2877.43,1237.3 cw(c2873.9,1233.76) 2877.43,1230.23 2867.1,1219.9 2856.77,1209.57 ccw(c2860.31,1206.03) 2856.77,1202.5 ccw(c2860.31,1206.03) 2863.84,1202.5 2884.5,1223.16 cw(c2888.04,1219.62) 2891.57,1223.16 cw(c2888.04,1219.62) 2891.57,1216.09 2870.91,1195.43 ccw(c2874.45,1191.89) 2870.91,1188.35 ccw(c2874.45,1191.89) 2877.98,1188.35 2898.65,1209.02 cw(c2902.18,1205.48) 2905.72,1209.02 cw(c2902.18,1205.48) 2905.72,1201.95 2885.05,1181.28 ccw(c2888.59,1177.75) 2885.05,1174.21 ccw(c2888.59,1177.75) 2892.13,1174.21 2912.79,1194.87 cw(c2916.32,1191.34) 2919.86,1194.87 cw(c2916.32,1191.34) 2919.86,1187.8 2913.06,1181.01 ccw(c2916.6,1177.47) 2913.06,1173.94 2922.95,1164.05 U9.42@2922.95,897 ; U9.42@2918.71,930.24 ccw(c2908.47,940.49) 2922.95,940.49 ccw(c2937.44,940.49) U9.42@2927.2,930.24
S_DB9: U3.J11 U9.44 | length 1400
  Top Layer w5: U3.J11@2650.32,1643.23 cw(c2650.32,1625.51) 2662.85,1638.04 cw(c2675.38,1650.57) U3.J11@2657.66,1650.57 ; U3.J11@2650.32,1650.57 2671,1629.89 2671,1356 2682.5,1344.5 ccw(c2686.04,1348.04) 2689.57,1344.5 2696.52,1351.45 cw(c2700.06,1347.92) 2703.6,1351.45 cw(c2700.06,1347.92) 2703.6,1344.38 2682.62,1323.4 ccw(c2686.15,1319.87) 2682.62,1316.33 ccw(c2686.15,1319.87) 2689.69,1316.33 2710.67,1337.31 cw(c2714.2,1333.78) 2717.74,1337.31 cw(c2714.2,1333.78) 2717.74,1330.24 2696.76,1309.26 ccw(c2700.3,1305.73) 2696.76,1302.19 ccw(c2700.3,1305.73) 2703.83,1302.19 2724.81,1323.17 cw(c2728.34,1319.63) 2731.88,1323.17 cw(c2728.34,1319.63) 2731.88,1316.1 2710.9,1295.12 ccw(c2714.44,1291.59) 2710.9,1288.05 ccw(c2714.44,1291.59) 2717.97,1288.05 2728.46,1298.54 2737.67,1307.75 cw(c2741.21,1304.21) 2744.74,1307.75 cw(c2741.21,1304.21) 2744.74,1300.68 2725.04,1280.98 ccw(c2728.58,1277.44) 2725.04,1273.91 ccw(c2728.58,1277.44) 2732.12,1273.91 2742.6,1284.4 2748.75,1290.54 cw(c2752.28,1287.01) 2755.82,1290.54 cw(c2752.28,1287.01) 2755.82,1283.47 2749.68,1277.32 2739.19,1266.84 ccw(c2742.72,1263.3) 2739.19,1259.77 ccw(c2742.72,1263.3) 2746.26,1259.77 2756.75,1270.25 2762.89,1276.4 cw(c2766.43,1272.86) 2769.96,1276.4 cw(c2766.43,1272.86) 2769.96,1269.33 2763.82,1263.18 2753.33,1252.69 ccw(c2756.86,1249.16) 2753.33,1245.62 ccw(c2756.86,1249.16) 2760.4,1245.62 2770.89,1256.11 2777.03,1262.26 cw(c2780.57,1258.72) 2784.1,1262.26 cw(c2780.57,1258.72) 2784.1,1255.19 2777.96,1249.04 2767.47,1238.55 ccw(c2771.01,1235.02) 2767.47,1231.48 ccw(c2771.01,1235.02) 2774.54,1231.48 2785.03,1241.97 2791.18,1248.11 cw(c2794.71,1244.58) 2798.25,1248.11 cw(c2794.71,1244.58) 2798.25,1241.04 2792.1,1234.9 2781.61,1224.41 ccw(c2785.15,1220.87) 2781.61,1217.34 ccw(c2785.15,1220.87) 2788.68,1217.34 2795.64,1224.29 cw(c2799.17,1220.76) 2802.71,1224.29 2859.99,1167.01 U9.44@2859.99,897 ; U9.44@2855.75,930.24 ccw(c2845.51,940.49) 2859.99,940.49 ccw(c2874.48,940.49) U9.44@2864.23,930.24
S_DB10: U3.J16 U9.45 | length 1400
  Top Layer w5: U3.J16@2645.12,1448.53 cw(c2633.35,1436.76) 2650,1436.76 ; 2650,1435.24 cw(c2668.8,1435.24) U3.J16@2655.51,1448.53 ; U3.J16@2650,1454 2650,1453.72 2650,1333 2800.18,1182.82 cw(c2796.64,1179.28) 2800.18,1175.75 2793.49,1169.06 ccw(c2797.03,1165.53) 2793.49,1161.99 ccw(c2797.03,1165.53) 2800.57,1161.99 2821.01,1182.43 cw(c2824.54,1178.9) 2828.08,1182.43 cw(c2824.54,1178.9) 2828.08,1175.36 2821.39,1168.68 ccw(c2824.93,1165.14) 2821.39,1161.61 2828.46,1154.54 2828.46,1144 cw(c2823.46,1144) 2823.46,1139 2814.01,1139 ccw(c2814.01,1134) 2809.01,1134 ccw(c2814.01,1134) 2814.01,1129 2842.92,1129 cw(c2842.92,1124) 2847.92,1124 cw(c2842.92,1124) 2842.92,1119 2814.01,1119 ccw(c2814.01,1114) 2809.01,1114 ccw(c2814.01,1114) 2814.01,1109 2842.92,1109 cw(c2842.92,1104) 2847.92,1104 cw(c2842.92,1104) 2842.92,1099 2814.01,1099 ccw(c2814.01,1094) 2809.01,1094 ccw(c2814.01,1094) 2814.01,1089 2842.92,1089 cw(c2842.92,1084) 2847.92,1084 cw(c2842.92,1084) 2842.92,1079 2814.01,1079 ccw(c2814.01,1074) 2809.01,1074 ccw(c2814.01,1074) 2814.01,1069 2842.92,1069 cw(c2842.92,1064) 2847.92,1064 cw(c2842.92,1064) 2842.92,1059 2814.01,1059 ccw(c2814.01,1054) 2809.01,1054 ccw(c2814.01,1054) 2814.01,1049 2842.92,1049 cw(c2842.92,1044) 2847.92,1044 cw(c2842.92,1044) 2842.92,1039 2814.01,1039 ccw(c2814.01,1034) 2809.01,1034 ccw(c2814.01,1034) 2814.01,1029 2842.92,1029 cw(c2842.92,1024) 2847.92,1024 cw(c2842.92,1024) 2842.92,1019 2814.01,1019 ccw(c2814.01,1014) 2809.01,1014 ccw(c2814.01,1014) 2814.01,1009 2842.92,1009 cw(c2842.92,1004) 2847.92,1004 cw(c2842.92,1004) 2842.92,999 2814.01,999 ccw(c2814.01,994) 2809.01,994 ccw(c2814.01,994) 2814.01,989 2842.92,989 cw(c2842.92,984) 2847.92,984 cw(c2842.92,984) 2842.92,979 2814.01,979 ccw(c2814.01,974) 2809.01,974 ccw(c2814.01,974) 2814.01,969 2842.92,969 cw(c2842.92,964) 2847.92,964 cw(c2842.92,964) 2842.92,959 2814.01,959 ccw(c2814.01,954) 2809.01,954 ccw(c2814.01,954) 2814.01,949 2823.46,949 cw(c2823.46,944) 2828.46,944 U9.45@2828.46,897 ; U9.45@2824.22,930.24 ccw(c2813.98,940.49) 2828.46,940.49 ccw(c2842.95,940.49) U9.45@2832.71,930.24
S_DB11: U3.J15 U9.47 | length 1400
  Top Layer w5: U3.J15@2642.97,1493.09 cw(c2625.25,1493.09) 2637.78,1480.56 cw(c2650.32,1468.03) U3.J15@2650.32,1485.75 ; U3.J15@2650.32,1493.09 2631,1473.78 2631,1315 2765.47,1180.53 2765.47,1155 ccw(c2770.47,1155) 2770.47,1150 2779.96,1150 cw(c2779.96,1145) 2784.96,1145 cw(c2779.96,1145) 2779.96,1140 2750.98,1140 ccw(c2750.98,1135) 2745.98,1135 ccw(c2750.98,1135) 2750.98,1130 2779.96,1130 cw(c2779.96,1125) 2784.96,1125 cw(c2779.96,1125) 2779.96,1120 2750.98,1120 ccw(c2750.98,1115) 2745.98,1115 ccw(c2750.98,1115) 2750.98,1110 2779.96,1110 cw(c2779.96,1105) 2784.96,1105 cw(c2779.96,1105) 2779.96,1100 2750.98,1100 ccw(c2750.98,1095) 2745.98,1095 ccw(c2750.98,1095) 2750.98,1090 2779.96,1090 cw(c2779.96,1085) 2784.96,1085 cw(c2779.96,1085) 2779.96,1080 2750.98,1080 ccw(c2750.98,1075) 2745.98,1075 ccw(c2750.98,1075) 2750.98,1070 2779.96,1070 cw(c2779.96,1065) 2784.96,1065 cw(c2779.96,1065) 2779.96,1060 2750.98,1060 ccw(c2750.98,1055) 2745.98,1055 ccw(c2750.98,1055) 2750.98,1050 2779.96,1050 cw(c2779.96,1045) 2784.96,1045 cw(c2779.96,1045) 2779.96,1040 2750.98,1040 ccw(c2750.98,1035) 2745.98,1035 ccw(c2750.98,1035) 2750.98,1030 2779.96,1030 cw(c2779.96,1025) 2784.96,1025 cw(c2779.96,1025) 2779.96,1020 2750.98,1020 ccw(c2750.98,1015) 2745.98,1015 ccw(c2750.98,1015) 2750.98,1010 2779.96,1010 cw(c2779.96,1005) 2784.96,1005 cw(c2779.96,1005) 2779.96,1000 2750.98,1000 ccw(c2750.98,995) 2745.98,995 ccw(c2750.98,995) 2750.98,990 2779.96,990 cw(c2779.96,985) 2784.96,985 cw(c2779.96,985) 2779.96,980 2750.98,980 ccw(c2750.98,975) 2745.98,975 ccw(c2750.98,975) 2750.98,970 2779.96,970 cw(c2779.96,965) 2784.96,965 cw(c2779.96,965) 2779.96,960 2750.98,960 ccw(c2750.98,955) 2745.98,955 ccw(c2750.98,955) 2750.98,950 2760.47,950 cw(c2760.47,945) 2765.47,945 U9.47@2765.47,897 ; U9.47@2761.23,930.24 ccw(c2750.99,940.49) 2765.47,940.49 ccw(c2779.96,940.49) U9.47@2769.72,930.24
S_DB12: U3.K16 U9.48 | length 1400
  Top Layer w5: U3.K16@2605.75,1448.53 cw(c2593.22,1436) 2610.94,1436 cw(c2628.67,1436) U3.K16@2616.14,1448.53 ; U3.K16@2610.94,1453.72 2610.94,1367.06 ccw(c2615.94,1367.06) 2615.94,1362.06 cw(c2615.94,1357.06) 2620.94,1357.06 cw(c2615.94,1357.06) 2615.94,1352.06 ccw(c2615.94,1347.06) 2610.94,1347.06 ccw(c2615.94,1347.06) 2615.94,1342.06 cw(c2615.94,1337.06) 2620.94,1337.06 cw(c2615.94,1337.06) 2615.94,1332.06 2605.51,1332.06 ccw(c2605.51,1327.06) 2600.51,1327.06 ccw(c2605.51,1327.06) 2605.51,1322.06 2615.94,1322.06 cw(c2615.94,1317.06) 2620.94,1317.06 cw(c2615.94,1317.06) 2615.94,1312.06 2605.51,1312.06 ccw(c2605.51,1307.06) 2600.51,1307.06 ccw(c2605.51,1307.06) 2605.51,1302.06 2625.82,1302.06 cw(c2625.82,1297.06) 2630.82,1297.06 cw(c2625.82,1297.06) 2625.82,1292.06 2605.51,1292.06 ccw(c2605.51,1287.06) 2600.51,1287.06 ccw(c2605.51,1287.06) 2605.51,1282.06 2625.82,1282.06 cw(c2625.82,1277.06) 2630.82,1277.06 cw(c2625.82,1277.06) 2625.82,1272.06 2615.94,1272.06 ccw(c2615.94,1267.06) 2610.94,1267.06 2610.94,1257.06 2620.84,1247.16 cw(c2617.3,1243.63) 2620.84,1240.09 2613.86,1233.11 ccw(c2617.39,1229.57) 2613.86,1226.04 ccw(c2617.39,1229.57) 2620.93,1226.04 2641.96,1247.07 cw(c2645.5,1243.53) 2649.03,1247.07 cw(c2645.5,1243.53) 2649.03,1240 2628,1218.97 ccw(c2631.54,1215.43) 2628,1211.9 ccw(c2631.54,1215.43) 2635.07,1211.9 2656.1,1232.93 cw(c2659.64,1229.39) 2663.18,1232.93 cw(c2659.64,1229.39) 2663.18,1225.86 2642.14,1204.82 ccw(c2645.68,1201.29) 2642.14,1197.75 ccw(c2645.68,1201.29) 2649.21,1197.75 2670.25,1218.79 cw(c2673.78,1215.25) 2677.32,1218.79 cw(c2673.78,1215.25) 2677.32,1211.71 2656.29,1190.68 ccw(c2659.82,1187.15) 2656.29,1183.61 ccw(c2659.82,1187.15) 2663.36,1183.61 2684.39,1204.64 cw(c2687.92,1201.11) 2691.46,1204.64 cw(c2687.92,1201.11) 2691.46,1197.57 2670.43,1176.54 ccw(c2673.96,1173.01) 2670.43,1169.47 ccw(c2673.96,1173.01) 2677.5,1169.47 2698.53,1190.5 cw(c2702.07,1186.97) 2705.6,1190.5 cw(c2702.07,1186.97) 2705.6,1183.43 2684.57,1162.4 ccw(c2688.11,1158.86) 2684.57,1155.33 ccw(c2688.11,1158.86) 2691.64,1155.33 2712.67,1176.36 cw(c2716.21,1172.82) 2719.74,1176.36 cw(c2716.21,1172.82) 2719.74,1169.29 2698.71,1148.26 ccw(c2702.25,1144.72) 2698.71,1141.19 ccw(c2702.25,1144.72) 2705.78,1141.19 2726.81,1162.22 cw(c2730.35,1158.68) 2733.89,1162.22 cw(c2730.35,1158.68) 2733.89,1155.15 2726.91,1148.17 ccw(c2730.44,1144.63) 2726.91,1141.09 2733.98,1134.02 2733.98,1122 cw(c2728.98,1122) 2728.98,1117 2719.1,1117 ccw(c2719.1,1112) 2714.1,1112 ccw(c2719.1,1112) 2719.1,1107 2728.98,1107 cw(c2728.98,1102) 2733.98,1102 cw(c2728.98,1102) 2728.98,1097 2719.1,1097 ccw(c2719.1,1092) 2714.1,1092 ccw(c2719.1,1092) 2719.1,1087 2728.98,1087 cw(c2728.98,1082) 2733.98,1082 cw(c2728.98,1082) 2728.98,1077 2726.87,1077 ccw(c2726.87,1072) 2721.87,1072 ccw(c2726.87,1072) 2726.87,1067 2728.98,1067 cw(c2728.98,1062) 2733.98,1062 cw(c2728.98,1062) 2728.98,1057 2728.44,1057 ccw(c2728.44,1052) 2723.44,1052 ccw(c2728.44,1052) 2728.44,1047 2728.98,1047 cw(c2728.98,1042) 2733.98,1042 U9.48@2733.98,897 ; U9.48@2729.73,930.24 ccw(c2719.49,940.49) 2733.98,940.49 ccw(c2748.46,940.49) U9.48@2738.22,930.24